# Altium PCB waffling60-BK.PcbDoc (part 2 of 2)
Units mm, origin at the board's own origin, x right, y up, seen from the top; angles counter-clockwise.
Board outline 284.8 x 94.3 mm, 2 copper layers (Component Side, Bottom Layer), stack 1.571 mm thick; 163 components, 103 nets, 753 pads, 61 vias.
Unrouted connection lines stored in the file: 18.
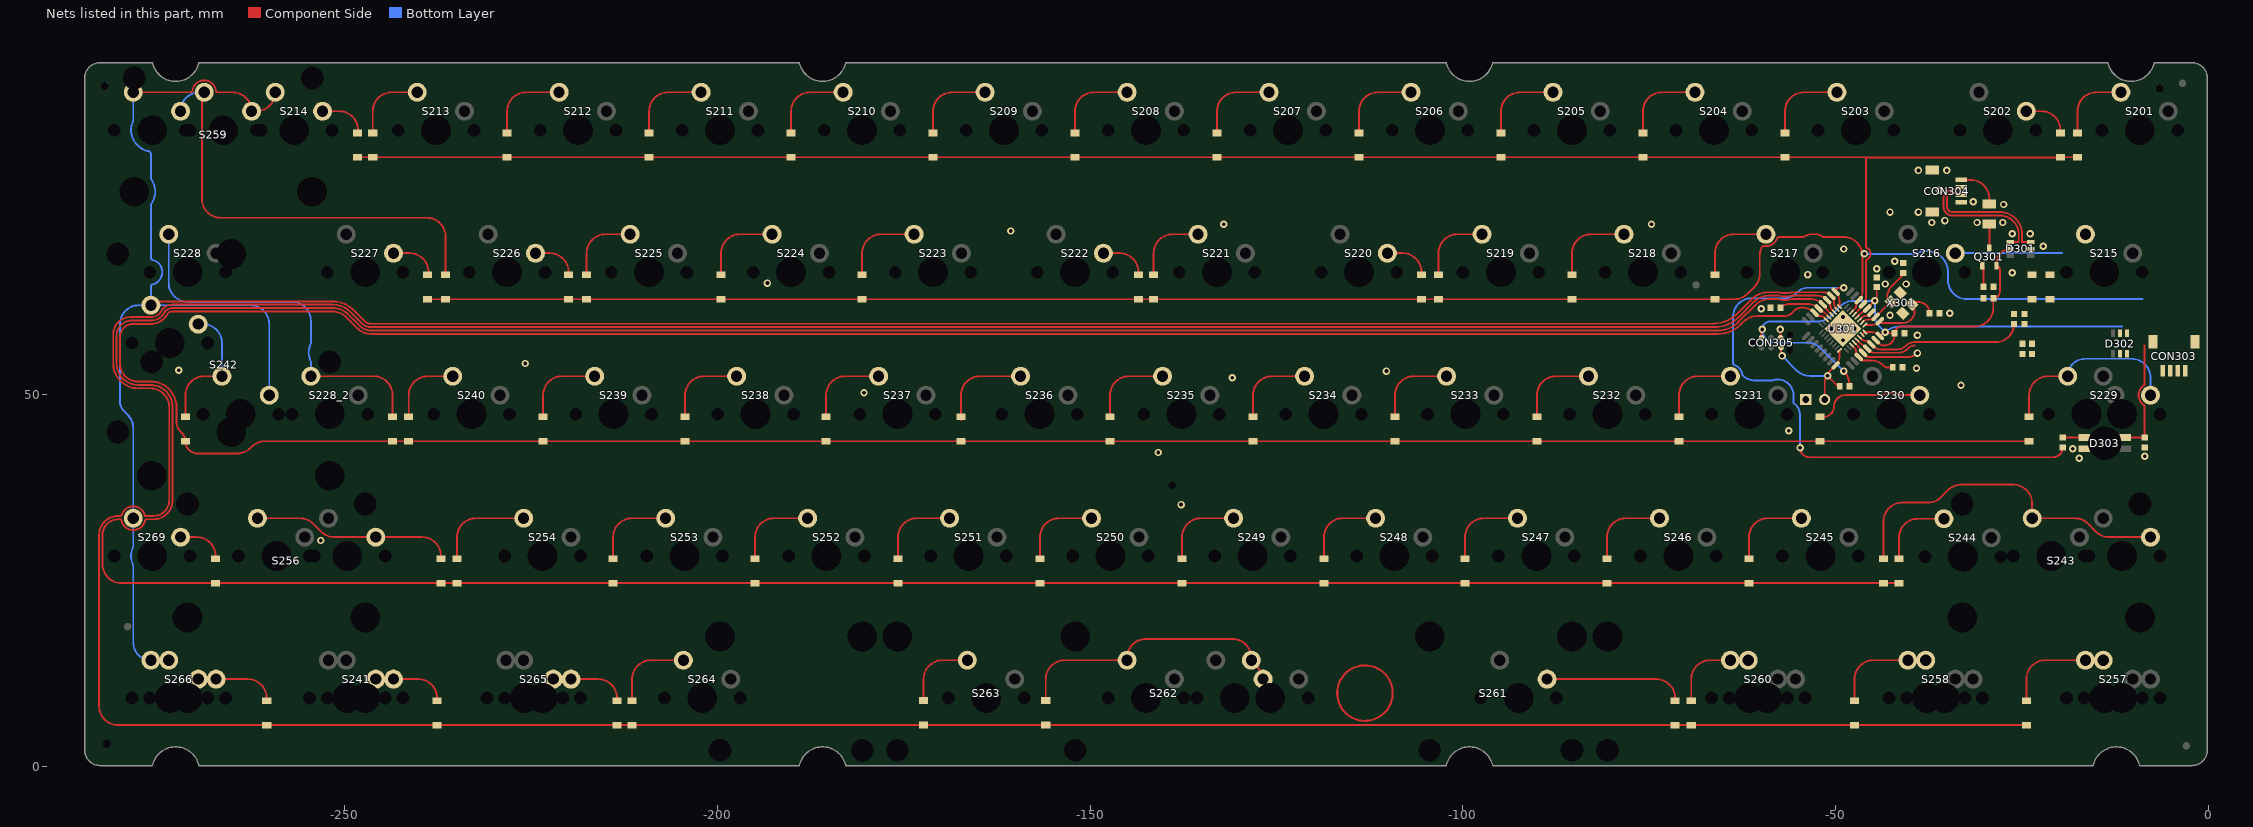
[diagram p2: the nets of this part, all layers, seen from the top]

## Via types
v1: diameter 1, hole 0.5, Component Side to Bottom Layer, tented both sides, 56 vias
v2: diameter 1, hole 0.5, Component Side to Bottom Layer, tented bottom, 5 vias

## Nets (pads, with @x,y where several pads share a name; then routed paths per layer and width w, separated by ;. In a path a pad name is that pad's centre, name@x,y a point inside that pad or via, vN(x,y) a via of type N, cw(c..) or ccw(c..) an arc to the next point about the centre after c; other vN are vias at no path point) (continued)
col14: S214.2 S242.2 S259.2 S266.2 S269.2 U301.10 | length 365.9
  Component Side w0.254: S259.2@-278.39,90.495 -272.542,90.495 -270.698,90.495 ccw(c-270.698,90.749) -270.447,90.714 cw(c-268.865,90.495) -270.403,90.924 cw(c-268.865,90.495) -268.362,92.011 cw(c-268.865,90.495) -268.36,92.01 cw(c-268.865,90.495) -267.283,90.714 ccw(c-267.032,90.749) -267.032,90.495 -265.055,90.495 cw(c-265.055,87.955) S259.2@-262.515,87.955 -261.88,87.955 ccw(c-261.88,90.495) S214.2@-259.34,90.495 ; S242.2@-276.02,61.925 cw(c-275.496,61.925) -275.496,62.449 -251.623,62.449 cw(c-251.623,58.547) -250.641,62.323 cw(c-251.623,58.547) -248.863,61.305 -248.592,61.034 -247.342,59.784 ccw(c-246.51,60.618) -247.329,59.772 ccw(c-246.51,60.618) -246.51,59.44 -66.518,59.44 ccw(c-66.518,64.25) -63.119,60.847 ccw(c-66.518,64.25) -63.117,60.849 -61.209,62.757 ; -61.209,62.757 cw(c-59.017,60.565) -59.017,63.665 -57.647,63.665 cw(c-57.646,63.411) -57.574,63.655 ccw(c-56.775,66.365) -55.976,63.655 cw(c-55.904,63.411) -55.903,63.665 -51.706,63.665 cw(c-51.706,62.015) U301.10@-50.54,63.182 cw(c-51.444,62.277) -50.165,62.277 -50.165,62.103 ccw(c-49.304,62.103) -49.913,61.494 U301.10@-49.797,61.379
  Bottom Layer w0.254: S259.2@-278.003,90.108 ccw(c-278.39,90.108) S259.2@-278.39,90.495 -278.39,86.712 cw(c-278.644,86.711) -278.414,86.604 ccw(c-275.85,85.415) -277.591,83.189 cw(c-277.747,82.989) -277.58,83.18 ccw(c-276.02,84.964) -276.486,82.641 ; -276.02,82.174 -276.02,81.534 -276.02,78.963 ccw(c-275.766,78.963) -275.972,78.814 cw(c-278.263,77.16) -275.972,75.506 ccw(c-275.766,75.357) -276.02,75.357 -276.02,68.26 ccw(c-275.766,68.26) -275.819,68.011 cw(c-276.167,66.365) -275.819,64.719 ccw(c-275.766,64.47) -276.02,64.47 S242.2@-276.02,61.925 ; -276.02,82.175 ccw(c-276.486,82.174) -276.335,82.615 ; S266.2@-276.008,14.295 cw(c-276.008,16.671) -278.384,16.671 -278.384,26.955 ccw(c-278.638,26.956) -278.408,27.064 cw(c-275.85,28.265) -278.408,29.466 ccw(c-278.638,29.574) -278.384,29.575 -278.384,33.345 S269.2@-278.39,33.345 -278.39,45.436 ccw(c-280.93,45.436) -279.134,47.232 -279.654,47.752 cw(c-278.428,48.978) -280.162,48.978 -280.162,59.385 cw(c-277.622,59.385) -277.622,61.925 S242.2@-276.02,61.925 ; S242.2@-260.14,49.855 -260.14,59.385 ccw(c-262.68,59.385) -262.68,61.925 S242.2@-276.02,61.925 ; -276.486,82.641 ccw(c-276.02,84.964) -276.335,82.615 ; -276.486,82.641 cw(c-276.486,82.174) -276.335,82.615
D_ALT_N: CON303.2@-4.072,53.148 D302.4 R309.2
D_ALT_P: CON303.3 D302.3 R308.2
D_N: CON304.2 D301.4 R305.2 | length 18.7
  Component Side w0.254: CON304.2@-33.125,77.75 cw(c-33.396,77.75) -33.396,77.479 -34.163,77.479 ccw(c-34.163,76.132) -35.509,76.132 -35.509,75.184 ccw(c-34.29,75.184) -34.29,73.965 -33.528,73.965 -30.48,73.965 -27.94,73.965 cw(c-27.94,71.425) -25.4,71.425 -25.4,70.485 ; D301.4@-26.521,70.419 -25.466,70.419 ccw(c-25.466,70.485) -25.4,70.485 ; -25.4,70.419 -25.4,70.485
D_P: CON304.3 D301.3 R304.2 | length 18.1
  Component Side w0.254: CON304.3@-33.125,76.75 ccw(c-33.396,76.75) -33.396,77.021 -34.163,77.021 ccw(c-34.163,76.132) -35.052,76.132 -35.052,75.184 ccw(c-34.29,75.184) -34.29,74.422 -27.94,74.422 cw(c-27.94,71.425) -24.943,71.425 -24.943,70.358 cw(c-24.882,70.358) -24.882,70.419 D301.3@-23.771,70.419
D_PRE_N: R305.1 R309.1 U301.30 | length 22.9
  Component Side w0.254: U301.30@-46.757,57.631 -46.579,57.453 ccw(c-45.847,58.185) -45.847,57.15 cw(c-45.847,56.648) -45.492,57.003 U301.30@-45.166,56.676 -44.888,56.399 ccw(c-43.942,57.345) -43.942,56.007 -41.704,56.007 ccw(c-41.704,57.655) -40.538,56.49 cw(c-39.373,55.324) -39.373,56.972 -28.484,56.972 ccw(c-28.484,59.421) R305.1@-26.035,59.421
D_PRE_P: R304.1 R308.1 U301.29 | length 8.7
  Component Side w0.254: U301.29@-47.11,57.277 -46.093,56.261 ccw(c-45.731,56.623) U301.29@-45.731,56.111 -45.451,55.83 ccw(c-44.774,56.507) -44.774,55.55 -41.514,55.55 ccw(c-41.514,57.198) -40.349,56.032 -40.215,56.166 cw(c-39.373,55.325) -39.373,56.515
GND: C301.1 C302.1 C303.1 C304.1 C305.1 C306.1 C307.1 CON303.1@-53.975,49.276 CON303.4 CON303.5 CON304.4 CON304.5 CON305.6 D301.2 D302.2 D303.3 R302.2 R306.2 U301.3 U301.28 X301.2 X301.4 | length 35.8
  Component Side w0.254: CON305.6@-57.357,57.531 v1@-57.357,58.213 ; U301.28@-47.464,56.924 U301.28@-46.447,55.907 ; U301.3@-46.757,59.964 -46.388,60.333 cw(c-46.101,60.046) -46.101,60.452 ccw(c-46.101,61.583) -45.302,60.783 U301.3@-45.166,60.919 ; U301.28@-46.447,55.907 cw(c-46.809,55.545) U301.28@-46.297,55.545 -45.737,54.985 -40.229,54.985 ccw(c-40.229,56.739) v1(-38.989,55.499) ; v1(-18.161,42.672) v1@-18.034,42.672 ; D303.3@-16.319,42.624 cw(c-16.251,42.624) D303.3@-16.315,42.648 ; D303.3@-16.3,42.672 D303.3@-16.157,42.672
  Component Side w0.279: -109.409,10.019 ccw(c-113.126,9.881) -109.408,10.005
  other v1: -253.238,30.353 -137.795,35.179 -17.272,41.402 -8.509,41.656 -140.843,42.164 -56.261,45.085 -180.34,50.165 -33.147,51.181 -130.937,52.197 -110.236,53.086 -272.288,53.213 -39.116,53.467 -225.806,54.102 -38.989,57.912 -57.404,58.674 -42.672,60.579 -34.671,60.833 -59.944,61.468 -43.307,64.77 -40.513,64.77 -193.294,64.897 -53.721,66.04 -26.289,66.294 -44.45,66.802 -42.037,67.818 -48.895,69.469 -22.098,69.85 -26.289,71.501 -23.876,71.501 -160.655,71.882 -132.08,72.771 -74.676,72.771 -37.084,73.025 -30.988,73.025 -27.559,73.025 -35.306,73.279 -42.672,74.422 -38.862,74.422 -27.432,75.438 -31.496,75.819 -36.068,77.343 -38.862,80.01 -35.052,80.01
  other v2: -48.984,57.242 -50.54,58.798 -48.984,58.798 -47.428,58.798 -48.984,60.353
LED: R307.2 U301.9 | length 81.1
  Component Side w0.254: v1(-54.737,42.799) ccw(c-53.467,42.799) -53.467,41.529 -20.821,41.529 ccw(c-20.821,42.85) R307.2@-19.5,42.85 R307.2@-19.761,42.85 ; U301.9@-49.444,61.732 -49.444,62.467 ccw(c-51.254,62.467) U301.9@-49.974,63.747 cw(c-49.459,63.747) -49.459,64.262 v1(-48.895,64.262)
  Bottom Layer w0.254: -56.161,51.257 ccw(c-57.727,49.855) -56.928,51.799 ccw(c-57.727,49.855) -56.93,51.8 ccw(c-57.727,49.855) -58.443,51.831 cw(c-58.53,52.07) -58.53,51.816 -60.706,51.816 cw(c-60.706,54.356) -62.419,52.481 cw(c-62.247,52.667) -62.498,52.63 ccw(c-64.077,52.395) -63.092,53.652 ccw(c-64.077,52.395) -63.094,53.653 ccw(c-64.077,52.395) -63.544,53.9 cw(c-63.459,54.14) -63.69,54.033 cw(c-63.092,54.31) -63.751,54.31 -63.751,60.325 cw(c-61.211,60.325) -61.211,62.865 -56.932,62.865 ccw(c-56.932,65.405) -55.136,63.609 -54.991,63.754 cw(c-53.765,62.528) -53.765,64.262 v1(-48.895,64.262) ; -56.161,51.256 cw(c-57.727,49.855) -55.639,50.095 cw(c-57.727,49.855) -55.627,49.923 cw(c-57.727,49.855) -55.627,49.79 ccw(c-55.373,49.783) -55.627,49.783 -55.627,48.92 ccw(c-55.373,48.92) -55.515,48.709 cw(c-56.457,47.315) -54.776,47.379 ; v1@-54.776,42.799 -54.776,47.246 ; -54.776,47.378 cw(c-56.457,47.315) -54.776,47.255 ; -54.776,47.246 cw(c-54.522,47.246) -54.776,47.255 ; -54.776,47.246 -54.776,47.255
NetC301_2: C301.2 U301.27 | length 6.9
  Component Side w0.254: U301.27@-47.817,56.57 -47.417,56.17 cw(c-47.833,55.753) -47.244,55.753 ccw(c-46.297,55.753) -46.967,55.083 U301.27@-46.863,54.979 -46.414,54.531 -45.287,54.531 cw(c-45.287,51.995) -43.493,53.787 -43.374,53.668 ccw(c-43.195,53.848) -43.195,53.594 C301.2@-42.306,53.594
NetC305_2: C305.2 U301.2 X301.3 | length 9.8
  Component Side w0.254: U301.2@-46.403,59.611 -46.373,59.641 cw(c-45.466,58.734) -45.466,60.017 -45.413,60.017 ccw(c-45.413,61.167) U301.2@-44.6,60.353 -42.571,62.363 X301.3@-42.527,62.407 cw(c-42.527,62.933) -43.053,62.933 cw(c-40.764,62.933) -42.383,64.551 -41.023,65.911 ccw(c-41.336,66.223) C305.2@-40.894,66.223
NetC306_2: C306.2 U301.1 X301.1 | length 12.4
  Component Side w0.254: U301.1@-46.05,59.257 -45.315,59.257 ccw(c-45.315,61.068) U301.1@-44.034,59.788 ccw(c-43.81,59.788) -43.81,59.563 -40.897,59.563 ccw(c-40.897,61.09) -39.37,61.09 ccw(c-40.733,61.09) X301.1@-39.769,62.053 ; X301.1@-39.769,62.053 cw(c-39.465,62.053) -39.465,62.357 -38.877,62.357 cw(c-38.877,60.833) C306.2@-37.353,60.833
NetD201_1: D201.1 S201.1 | length 10.2
  Component Side w0.254: D201.1@-17.526,85.05 -17.526,87.955 cw(c-14.986,87.955) -14.986,90.495 S201.1@-11.69,90.495
NetD202_1: D202.1 S202.1 | length 6.4
  Component Side w0.254: S202.1@-24.39,87.955 -22.352,87.955 cw(c-22.352,85.415) -19.812,85.415 D202.1@-19.812,85.05
NetD203_1: D203.1 S203.1 | length 11.3
  Component Side w0.254: D203.1@-56.769,85.05 -56.769,87.955 cw(c-54.229,87.955) -54.229,90.495 S203.1@-49.79,90.495
NetD204_1: D204.1 S204.1 | length 11.3
  Component Side w0.254: D204.1@-75.819,85.05 -75.819,87.955 cw(c-73.279,87.955) -73.279,90.495 S204.1@-68.84,90.495
NetD205_1: D205.1 S205.1 | length 11.3
  Component Side w0.254: D205.1@-94.869,85.05 -94.869,87.955 cw(c-92.329,87.955) -92.329,90.495 S205.1@-87.89,90.495
NetD206_1: D206.1 S206.1 | length 11.3
  Component Side w0.254: D206.1@-113.919,85.05 -113.919,87.955 cw(c-111.379,87.955) -111.379,90.495 S206.1@-106.94,90.495
NetD207_1: D207.1 S207.1 | length 11.3
  Component Side w0.254: D207.1@-132.969,85.05 -132.969,87.955 cw(c-130.429,87.955) -130.429,90.495 S207.1@-125.99,90.495
NetD208_1: D208.1 S208.1 | length 11.3
  Component Side w0.254: D208.1@-152.019,85.05 -152.019,87.955 cw(c-149.479,87.955) -149.479,90.495 S208.1@-145.04,90.495
NetD209_1: D209.1 S209.1 | length 11.3
  Component Side w0.254: D209.1@-171.069,85.05 -171.069,87.955 cw(c-168.529,87.955) -168.529,90.495 S209.1@-164.09,90.495
NetD210_1: D210.1 S210.1 | length 11.3
  Component Side w0.254: D210.1@-190.119,85.05 -190.119,87.955 cw(c-187.579,87.955) -187.579,90.495 S210.1@-183.14,90.495
NetD211_1: D211.1 S211.1 | length 11.3
  Component Side w0.254: D211.1@-209.169,85.05 -209.169,87.955 cw(c-206.629,87.955) -206.629,90.495 S211.1@-202.19,90.495
NetD212_1: D212.1 S212.1 | length 11.3
  Component Side w0.254: D212.1@-228.219,85.05 -228.219,87.955 cw(c-225.679,87.955) -225.679,90.495 S212.1@-221.24,90.495
NetD213_1: D213.1 S213.1 | length 10.3
  Component Side w0.254: D213.1@-246.253,85.05 -246.253,87.955 cw(c-243.713,87.955) -243.713,90.495 S213.1@-240.29,90.495
NetD214_1: D214.1 S214.1 | length 6.6
  Component Side w0.254: S214.1@-252.99,87.955 -250.759,87.955 cw(c-250.759,85.415) -248.219,85.415 D214.1@-248.219,85.05
NetD215_1: D215.1 S215.1
NetD216_1: D216.1 S216.1 | length 14.4
  Bottom Layer w0.254: S216.1@-33.915,68.905 -22.622,68.905 -19.558,68.905
NetD217_1: D217.1 S217.1 | length 11.2
  Component Side w0.254: D217.1@-66.167,66 -66.167,68.905 cw(c-63.627,68.905) -63.627,71.445 S217.1@-59.315,71.445
NetD218_1: D218.1 S218.1 | length 11.3
  Component Side w0.254: D218.1@-85.344,66 -85.344,68.905 cw(c-82.804,68.905) -82.804,71.445 S218.1@-78.365,71.445
NetD219_1: D219.1 S219.1 | length 10.2
  Component Side w0.254: D219.1@-103.251,66 -103.251,68.905 cw(c-100.711,68.905) -100.711,71.445 S219.1@-97.415,71.445
NetD220_1: D220.1 S220.1 | length 6.4
  Component Side w0.254: S220.1@-110.115,68.905 -108.077,68.905 cw(c-108.077,66.365) -105.537,66.365 D220.1@-105.537,66
NetD221_1: D221.1 S221.1 | length 10.3
  Component Side w0.254: D221.1@-141.478,66 -141.478,68.905 cw(c-138.938,68.905) -138.938,71.445 S221.1@-135.515,71.445
NetD222_1: D222.1 S222.1 | length 6.5
  Component Side w0.254: S222.1@-148.215,68.905 -146.05,68.905 cw(c-146.05,66.365) -143.51,66.365 D222.1@-143.51,66
NetD223_1: D223.1 S223.1 | length 11.3
  Component Side w0.254: D223.1@-180.594,66 -180.594,68.905 cw(c-178.054,68.905) -178.054,71.445 S223.1@-173.615,71.445
NetD224_1: D224.1 S224.1 | length 11.2
  Component Side w0.254: D224.1@-199.517,66 -199.517,68.905 cw(c-196.977,68.905) -196.977,71.445 S224.1@-192.665,71.445
NetD225_1: D225.1 S225.1 | length 10.2
  Component Side w0.254: D225.1@-217.551,66 -217.551,68.905 cw(c-215.011,68.905) -215.011,71.445 S225.1@-211.715,71.445
NetD226_1: D226.1 S226.1 | length 6.3
  Component Side w0.254: S226.1@-224.415,68.905 -222.504,68.905 cw(c-222.504,66.365) -219.964,66.365 D226.1@-219.964,66
NetD227_1: D227.1 S227.1 | length 6.5
  Component Side w0.254: S227.1@-243.465,68.905 -241.3,68.905 cw(c-241.3,66.365) -238.76,66.365 D227.1@-238.76,66
NetD228_1: D228.1 S259.1 | length 60
  Component Side w0.254: S259.1@-269.5,90.495 -269.182,90.495 -269.182,76.2 ccw(c-266.642,76.2) -266.642,73.66 -239.014,73.66 cw(c-239.014,71.12) -236.474,71.12 D228.1@-236.474,66
  Bottom Layer w0.254: S259.1@-272.04,87.955 cw(c-269.5,87.955) -269.5,90.495 S259.1@-268.865,90.495
NetD229_1: D229.1 S229.1 | length 25.8
  Component Side w0.254: D229.1@-24.003,46.95 -24.003,49.855 cw(c-21.463,49.855) -21.463,52.395 S229.1@-18.834,52.395
  Bottom Layer w0.254: S229.1@-18.834,52.395 cw(c-16.492,52.395) -16.492,54.737 -10.261,54.737 cw(c-10.261,52.197) -7.721,52.197 S229.1@-7.721,49.855
NetD230_1: D230.1 S230.1 | length 15.1
  Component Side w0.254: D230.1@-52.07,46.95 -51.602,46.95 ccw(c-51.602,48.387) -50.165,48.387 cw(c-48.697,48.387) -48.697,49.855 -46.657,49.855 -43.783,49.855 ccw(c-43.783,50.109) -43.676,49.879 cw(c-42.487,47.315) -41.299,49.879 ccw(c-41.192,50.109) -41.192,49.855 S230.1@-38.677,49.855
NetD231_1: D231.1 S231.1 | length 11.3
  Component Side w0.254: D231.1@-70.993,46.95 -70.993,49.855 cw(c-68.453,49.855) -68.453,52.395 S231.1@-64.077,52.395
NetD232_1: D232.1 S232.1 | length 11.3
  Component Side w0.254: D232.1@-90.043,46.95 -90.043,49.855 cw(c-87.503,49.855) -87.503,52.395 S232.1@-83.127,52.395
NetD233_1: D233.1 S233.1 | length 11.3
  Component Side w0.254: D233.1@-109.093,46.95 -109.093,49.855 cw(c-106.553,49.855) -106.553,52.395 S233.1@-102.177,52.395
NetD234_1: D234.1 S234.1 | length 11.3
  Component Side w0.254: D234.1@-128.143,46.95 -128.143,49.855 cw(c-125.603,49.855) -125.603,52.395 S234.1@-121.227,52.395
NetD235_1: D235.1 S235.1 | length 11.4
  Component Side w0.254: D235.1@-147.32,46.95 -147.32,49.855 cw(c-144.78,49.855) -144.78,52.395 S235.1@-140.277,52.395
NetD236_1: D236.1 S236.1 | length 12.8
  Component Side w0.254: D236.1@-167.32,46.515 D236.1@-167.32,46.95 -167.32,49.855 cw(c-164.78,49.855) -164.78,52.395 S236.1@-159.327,52.395
NetD237_1: D237.1 S237.1 | length 11.4
  Component Side w0.254: D237.1@-185.42,46.95 -185.42,49.855 cw(c-182.88,49.855) -182.88,52.395 S237.1@-178.377,52.395
NetD238_1: D238.1 S238.1 | length 10.8
  Component Side w0.254: D238.1@-204.343,46.95 -204.343,49.855 cw(c-201.803,49.855) -201.803,52.395 S238.1@-197.881,52.395
NetD239_1: D239.1 S239.1 | length 11.3
  Component Side w0.254: D239.1@-223.393,46.95 -223.393,49.855 cw(c-220.853,49.855) -220.853,52.395 S239.1@-216.477,52.395
NetD240_1: D240.1 S240.1 | length 10.3
  Component Side w0.254: D240.1@-241.427,46.95 -241.427,49.855 cw(c-238.887,49.855) -238.887,52.395 S240.1@-235.527,52.395
NetD241_1: D241.1 S242.1 | length 18.3
  Component Side w0.254: D241.1@-271.399,46.95 -271.399,49.855 cw(c-268.859,49.855) -268.859,52.395 S242.1@-266.49,52.395
  Bottom Layer w0.254: S242.1@-269.67,59.385 -269.03,59.385 cw(c-269.03,56.845) -266.49,56.845 S242.1@-266.49,52.395
NetD242_1: D242.1 S228.1 S228_2.1 | length 51.3
  Component Side w0.254: S228_2.1@-254.552,52.395 -246.126,52.395 cw(c-246.126,49.855) -243.586,49.855 D242.1@-243.586,46.95
  Bottom Layer w0.254: S228.1@-273.627,71.445 -273.627,64.919 ccw(c-271.087,64.919) -271.087,62.379 -257.092,62.379 cw(c-257.092,59.839) -254.552,59.839 -254.552,56.867 cw(c-254.806,56.866) -254.576,56.759 ccw(c-252.012,55.57) -254.576,54.381 cw(c-254.806,54.274) -254.552,54.273 S228_2.1@-254.552,52.395
NetD243_1: D243.1 S243.1 | length 47.3
  Component Side w0.254: D243.1@-43.561,27.9 -43.561,32.893 cw(c-41.021,32.893) -41.021,35.433 -37.628,35.433 ccw(c-37.628,37.973) -35.832,36.177 -34.907,37.102 cw(c-33.111,35.306) -33.111,37.846 -26.136,37.846 cw(c-26.136,35.306) -23.596,35.306 S243.1@-23.596,33.345 -17.887,33.345 cw(c-17.887,30.805) -16.091,32.601 -15.039,31.549 ccw(c-13.243,33.345) -13.243,30.805 S243.1@-7.721,30.805
NetD244_1: D244.1 S244.2 | length 10.3
  Component Side w0.254: D244.1@-41.468,27.9 -41.468,30.734 cw(c-38.928,30.734) -38.928,33.274 S244.2@-35.433,33.274
NetD245_1: D245.1 S245.1 | length 11.4
  Component Side w0.254: D245.1@-61.595,27.9 -61.595,30.805 cw(c-59.055,30.805) -59.055,33.345 S245.1@-54.552,33.345
NetD246_1: D246.1 S246.1 | length 11.4
  Component Side w0.254: D246.1@-80.645,27.9 -80.645,30.805 cw(c-78.105,30.805) -78.105,33.345 S246.1@-73.602,33.345
NetD247_1: D247.1 S247.1 | length 11.4
  Component Side w0.254: D247.1@-99.695,27.9 -99.695,30.805 cw(c-97.155,30.805) -97.155,33.345 S247.1@-92.652,33.345
NetD248_1: D248.1 S248.1 | length 11.3
  Component Side w0.254: D248.1@-118.618,27.9 -118.618,30.805 cw(c-116.078,30.805) -116.078,33.345 S248.1@-111.702,33.345
NetD249_1: D249.1 S249.1 | length 12.5
  Component Side w0.254: D249.1@-137.668,27.9 -137.668,30.805 cw(c-135.128,30.805) -135.128,33.345 S249.1@-130.752,33.345
  Bottom Layer w0.254: S249.1@-130.752,33.345 S249.1@-130.752,34.544
NetD250_1: D250.1 S250.1 | length 11.3
  Component Side w0.254: D250.1@-156.718,27.9 -156.718,30.805 cw(c-154.178,30.805) -154.178,33.345 S250.1@-149.802,33.345
NetD251_1: D251.1 S251.1 | length 11.3
  Component Side w0.254: D251.1@-175.768,27.9 -175.768,30.805 cw(c-173.228,30.805) -173.228,33.345 S251.1@-168.852,33.345
NetD252_1: D252.1 S252.1 | length 11.4
  Component Side w0.254: D252.1@-194.945,27.9 -194.945,30.805 cw(c-192.405,30.805) -192.405,33.345 S252.1@-187.902,33.345
NetD253_1: D253.1 S253.1 | length 11.4
  Component Side w0.254: D253.1@-213.995,27.9 -213.995,30.805 cw(c-211.455,30.805) -211.455,33.345 S253.1@-206.952,33.345
NetD254_1: D254.1 S254.1 | length 13.3
  Component Side w0.254: D254.1@-234.95,27.9 -234.95,30.805 cw(c-232.41,30.805) -232.41,33.345 S254.1@-226.002,33.345
NetD255_1: D255.1 S256.1 | length 27.2
  Component Side w0.254: S256.1@-261.62,33.345 -256.012,33.345 cw(c-256.012,30.805) -254.216,32.601 -253.164,31.549 ccw(c-251.368,33.345) -251.368,30.805 -245.745,30.805 -239.649,30.805 cw(c-239.649,28.265) -237.109,28.265 D255.1@-237.109,27.9
NetD256_1: D256.1 S269.1 | length 6.5
  Component Side w0.254: S269.1@-272.04,30.805 -269.875,30.805 cw(c-269.875,28.265) -267.335,28.265 D256.1@-267.335,27.9
NetD257_1: D257.1 S257.2 | length 12.3
  Component Side w0.254: D257.1@-24.384,8.85 -24.384,11.755 cw(c-21.844,11.755) -21.844,14.295 S257.2@-16.452,14.295
NetD258_1: D258.1 S258.2 | length 11.5
  Component Side w0.254: D258.1@-47.437,8.85 -47.437,11.755 cw(c-44.897,11.755) -44.897,14.295 S258.2@-40.264,14.295
NetD259_1: D259.1 S260.2 | length 9.6
  Component Side w0.254: D259.1@-69.342,8.85 -69.342,11.755 cw(c-66.802,11.755) -66.802,14.295 S260.2@-64.077,14.295
NetD260_1: D260.1 S261.1 | length 19
  Component Side w0.254: S261.1@-88.683,11.755 -74.041,11.755 cw(c-74.041,9.215) -73.914,11.752 cw(c-74.041,9.215) -71.501,9.215 D260.1@-71.501,8.85
NetD261_1: D261.1 S262.2 | length 38.8
  Component Side w0.254: D261.1@-155.956,8.874 -155.956,11.755 cw(c-153.416,11.755) -153.416,14.295 S262.2@-145.039,14.295 -145.039,14.605 cw(c-142.499,14.605) -142.499,17.145 -130.903,17.145 cw(c-130.903,14.605) -128.363,14.605 S262.2@-128.363,14.295 -127.837,13.769 cw(c-129.633,11.973) -127.093,11.973 S262.2@-127.093,11.755
  Bottom Layer w0.254: S262.2@-145.039,14.295 S262.2@-145.039,14.478 ; S262.2@-128.363,14.295 S262.2@-128.363,14.478
NetD262_1: D262.1 S263.2 | length 10.2
  Component Side w0.254: D262.1@-172.339,8.874 -172.339,11.755 cw(c-169.799,11.755) -169.799,14.295 S263.2@-166.471,14.295
NetD263_1: D263.1 S264.1 | length 11.2
  Component Side w0.254: D263.1@-211.455,8.85 -211.455,11.755 cw(c-208.915,11.755) -208.915,14.295 S264.1@-204.571,14.295
NetD264_1: D264.1 S265.1 | length 8
  Component Side w0.254: S265.1@-219.652,11.755 -216.027,11.755 cw(c-216.027,9.215) -213.487,9.215 D264.1@-213.487,8.85
NetD265_1: D265.1 S241.1 | length 7.7
  Component Side w0.254: S241.1@-243.464,11.755 -240.157,11.755 cw(c-240.157,9.215) -237.617,9.215 D265.1@-237.617,8.85
NetD266_1: D266.1 S266.1 | length 8.6
  Component Side w0.254: S266.1@-267.277,11.755 -263.017,11.755 cw(c-263.017,9.215) -260.477,9.215 D266.1@-260.477,8.85
NetD303_4: D303.4 R307.1 | length 3.4
  Component Side w0.254: R307.1@-19.558,44.084 cw(c-19.346,43.872) -19.346,44.172 D303.4@-16.157,44.172
NetF301_1: F301.1 Q301.3 | length 3.2
  Component Side w0.254: Q301.3@-29.352,69.6 -29.337,69.6 F301.1@-29.337,72.818
NetQ301_1: Q301.1 R306.1 | length 2.9
  Component Side w0.254: Q301.1@-30.302,67.2 cw(c-30.302,67.012) -30.114,67.012 R306.1@-30.114,64.389
NetR302_1: R302.1 U301.13 | length 7.3
  Component Side w0.254: R302.1@-57.389,61.595 cw(c-56.163,60.369) -56.163,62.103 -53.729,62.103 cw(c-53.729,59.992) U301.13@-52.237,61.485 cw(c-52.237,60.973) -51.875,61.335 U301.13@-50.858,60.318
RAW: CON303.1@-3.072,53.148 CON304.1 D302.5 F301.2 | length 5.9
  Component Side w0.254: CON304.1@-33.125,78.75 -31.877,78.75 cw(c-31.877,76.21) -29.337,76.21 F301.2@-29.337,75.518
row1: D201.2 D202.2 D203.2 D204.2 D205.2 D206.2 D207.2 D208.2 D209.2 D210.2 D211.2 D212.2 D213.2 D214.2 U301.5 | length 252.9
  Component Side w0.254: D214.2@-248.285,81.78 D213.2@-246.253,81.78 D212.2@-228.219,81.78 D211.2@-209.169,81.78 D210.2@-190.119,81.78 D209.2@-171.069,81.78 D208.2@-152.019,81.78 D207.2@-132.969,81.78 D206.2@-113.919,81.78 D205.2@-94.869,81.78 D204.2@-75.819,81.78 -45.901,81.78 ; U301.5@-47.464,60.672 -46.447,61.688 ccw(c-46.809,62.05) U301.5@-46.297,62.05 ; U301.5@-46.297,62.051 ccw(c-47.253,63.006) -45.901,63.006 -45.901,66.675 -45.901,67.853 cw(c-45.647,67.853) -45.754,68.083 ccw(c-46.101,68.834) -45.754,69.585 cw(c-45.647,69.815) -45.901,69.815 -45.901,71.12 -45.901,81.726 D202.2@-19.812,81.726 ; D202.2@-19.812,81.78 D201.2@-17.526,81.78
row2: D215.2 D216.2 D217.2 D218.2 D219.2 D220.2 D221.2 D222.2 D223.2 D224.2 D225.2 D226.2 D227.2 D228.2 U301.6 | length 249.2
  Component Side w0.254: D227.2@-238.76,62.73 D224.2@-199.517,62.73 D223.2@-180.594,62.73 D222.2@-143.51,62.73 D221.2@-141.478,62.73 -105.41,62.73 -103.124,62.73 D218.2@-85.344,62.73 D217.2@-66.167,62.73 -63.572,62.73 ccw(c-63.572,65.27) -61.776,63.474 -60.894,64.356 ccw(c-62.705,66.167) -60.144,66.167 -60.144,68.526 cw(c-57.604,68.526) -59.835,69.741 cw(c-59.612,69.618) -59.572,69.869 ccw(c-59.315,71.445) -57.814,70.9 cw(c-57.575,70.814) -57.604,71.066 -54.401,71.066 ccw(c-54.401,71.32) -54.271,71.102 cw(c-52.965,68.905) -51.659,71.102 ccw(c-51.529,71.32) -51.529,71.066 -48.895,71.066 cw(c-48.895,68.526) -46.355,68.526 -46.355,63.842 cw(c-48.088,63.842) -46.534,63.075 cw(c-48.088,63.842) -46.751,62.739 cw(c-48.088,63.842) U301.6@-46.863,62.616 -46.881,62.597 ccw(c-46.006,61.722) -47.244,61.722 cw(c-47.542,61.722) -47.331,61.511 U301.6@-47.817,61.025
  Bottom Layer w0.254: v1(-46.101,68.834) ccw(c-46.077,68.834) -46.077,68.81 -41.529,68.81 -39.142,68.81 cw(c-37.725,66.365) -36.634,68.971 cw(c-37.725,66.365) -35.023,67.192 cw(c-37.725,66.365) -34.9,66.422 ; -34.9,66.31 ccw(c-34.646,66.306) -34.9,66.306 -34.9,65.278 ccw(c-32.36,65.278) -32.36,62.738 -8.763,62.738 ; -34.9,66.311 ccw(c-37.725,66.365) -34.9,66.421
row3: D229.2 D230.2 D231.2 D232.2 D233.2 D234.2 D235.2 D236.2 D237.2 D238.2 D239.2 D240.2 D241.2 D242.2 U301.14 | length 501.3
  Component Side w0.254: U301.14@-51.211,59.964 -51.526,60.279 ccw(c-51.943,59.863) -51.943,60.452 cw(c-51.943,61.399) -52.613,60.729 U301.14@-52.802,60.919 ccw(c-54.434,59.287) -52.803,60.92 ccw(c-54.434,59.287) -54.434,61.595 -54.548,61.595 ccw(c-54.548,60.202) -55.533,61.187 -55.821,60.9 cw(c-56.902,61.982) -56.896,60.452 -57.203,60.452 -60.536,60.452 ccw(c-60.536,57.912) -62.332,59.708 -62.686,59.354 cw(c-65.766,62.434) -62.737,59.304 cw(c-65.766,62.434) -63.497,58.716 cw(c-65.766,62.434) -65.766,58.078 -246.51,58.078 cw(c-246.51,60.618) -248.306,58.822 -249.827,60.343 ccw(c-251.623,58.547) -251.623,61.087 -273.139,61.087 ccw(c-273.139,60.22) -273.752,60.833 cw(c-276.009,61.92) -274.179,60.209 cw(c-276.009,61.92) -276.009,59.415 -278.405,59.415 ccw(c-278.405,57.658) -280.162,57.658 -280.162,54.102 ccw(c-277.749,54.102) -277.749,51.689 -276.038,51.689 cw(c-276.038,48.241) -272.59,48.241 -272.59,46.3 ccw(c-270.692,46.3) -272.034,44.958 -271.854,44.778 cw(c-272.951,43.68) D241.2@-271.399,43.68 ccw(c-269.756,43.68) -271.162,42.83 ccw(c-269.756,43.68) -269.756,42.037 -264.45,42.037 ccw(c-264.45,44.577) -262.654,42.781 -262.499,42.936 cw(c-260.703,41.14) -260.703,43.68 D242.2@-243.586,43.68 D240.2@-241.427,43.68 D239.2@-223.393,43.68 D238.2@-204.343,43.68 D237.2@-185.42,43.68 D236.2@-167.32,43.68 D232.2@-90.043,43.68 D231.2@-70.993,43.68 D230.2@-52.07,43.68 D229.2@-24.003,43.68
row4: D243.2 D244.2 D245.2 D246.2 D247.2 D248.2 D249.2 D250.2 D251.2 D252.2 D253.2 D254.2 D255.2 D256.2 U301.12 | length 522.2
  Component Side w0.254: U301.12@-50.504,60.672 -51.521,61.688 cw(c-51.159,62.05) U301.12@-51.671,62.05 ccw(c-53.377,60.345) -51.672,62.051 ccw(c-53.377,60.345) -53.377,62.757 -55.78,62.757 ccw(c-55.781,62.503) -55.845,62.749 cw(c-56.775,66.365) -57.705,62.749 ccw(c-57.769,62.503) -57.77,62.757 -58.873,62.757 ccw(c-58.873,60.217) -60.669,62.013 -63.007,59.675 cw(c-65.766,62.434) -63.008,59.674 cw(c-65.766,62.434) -65.766,58.532 -246.51,58.532 cw(c-246.51,60.618) -247.983,59.141 -248.345,59.503 -249.505,60.663 ccw(c-251.623,58.547) -251.623,61.541 -273.139,61.541 ccw(c-273.139,60.22) -274.074,61.153 ccw(c-273.752,60.833) -274.156,61.041 -274.205,60.945 -274.212,60.932 cw(c-276.009,61.92) -274.304,60.78 cw(c-276.009,61.92) -276.009,59.869 -278.593,59.869 ccw(c-278.593,57.846) -280.616,57.846 -280.616,54.102 ccw(c-277.749,54.102) -277.749,51.235 -276.098,51.235 cw(c-276.098,48.241) -273.104,48.241 -273.104,35.748 cw(c-275.644,35.748) -274.443,33.51 cw(c-275.644,35.748) -275.644,33.208 -276.58,33.208 ccw(c-276.581,32.954) -276.829,33.008 cw(c-278.39,33.345) -279.95,33.002 ccw(c-280.198,32.947) -280.198,33.201 -280.416,33.201 ccw(c-280.416,31.115) -280.894,33.146 ccw(c-280.416,31.115) -282.502,31.115 -282.502,27.17 ccw(c-279.962,27.17) -279.962,24.63 D256.2@-267.335,24.63 D255.2@-237.109,24.63 D254.2@-234.95,24.63 D253.2@-213.995,24.63 D252.2@-194.945,24.63 D251.2@-175.768,24.63 D250.2@-156.718,24.63 D249.2@-137.668,24.63 D248.2@-118.618,24.63 D247.2@-99.695,24.63 D246.2@-80.645,24.63 D245.2@-61.595,24.63 D243.2@-43.561,24.63 D244.2@-41.468,24.63
row5: D257.2 D258.2 D259.2 D260.2 D261.2 D262.2 D263.2 D264.2 D265.2 D266.2 U301.11 | length 560
  Component Side w0.254: D262.2@-172.339,5.604 D262.2@-172.339,5.588 ; -60.99,62.334 -63.062,60.262 cw(c-66.142,63.342) -66.142,58.986 -246.51,58.986 cw(c-246.51,60.618) -247.015,59.066 cw(c-246.51,60.618) -247.663,59.463 -248.309,60.109 -248.341,60.142 -249.185,60.985 ccw(c-251.623,58.547) -250.284,61.725 ccw(c-251.623,58.547) -251.623,61.995 -273.139,61.995 ccw(c-273.139,60.22) -274.395,61.474 ccw(c-273.752,60.833) -274.553,61.26 -274.627,61.122 -274.64,61.097 cw(c-276.009,61.92) -276.009,60.323 -278.781,60.323 ccw(c-278.781,58.034) -281.07,58.034 -281.07,54.102 ccw(c-277.749,54.102) -277.749,50.781 -276.098,50.781 cw(c-276.098,48.241) -273.558,48.241 -273.558,35.748 cw(c-275.644,35.748) -274.172,34.27 cw(c-275.644,35.748) -275.644,33.662 -276.825,33.662 ccw(c-278.39,33.345) -279.911,33.832 cw(c-280.153,33.909) -280.153,33.655 -280.416,33.655 ccw(c-280.416,31.115) -282.956,31.115 -282.956,8.12 ccw(c-280.416,8.12) -280.416,5.58 D265.2@-237.617,5.58 -215.265,5.58 -215.265,5.588 D262.2@-172.339,5.588 ; -60.989,62.335 cw(c-58.873,60.217) -58.873,63.211 -57.711,63.211 cw(c-57.709,62.957) -57.642,63.202 ccw(c-56.775,66.365) -55.908,63.202 cw(c-55.841,62.957) -55.839,63.211 -52.541,63.211 cw(c-52.541,61.18) U301.11@-51.105,62.616 ; U301.11@-51.105,62.616 -50.91,62.421 cw(c-51.481,61.849) -50.673,61.849 ccw(c-49.945,61.849) -50.46,61.334 U301.11@-50.151,61.025 ; D257.2@-24.384,5.58 D258.2@-47.437,5.58 D259.2@-69.342,5.58 D260.2@-71.501,5.58 -104.648,5.58 -104.648,5.588 D262.2@-172.339,5.588
RST: CON303.2@-51.435,49.276 CON305.5 R301.2 U301.24 | length 17.7
  Component Side w0.254: CON305.5@-57.277,56.261 -57.277,55.245 v1(-57.15,55.118) ; CON303.2@-51.435,49.276 -51.435,51.531 cw(c-50.134,51.531) v1(-51.054,52.451) ; U301.24@-49.444,55.863 -49.444,55.128 cw(c-51.254,55.128) U301.24@-49.974,53.848 -50.83,52.992 ccw(c-50.289,52.451) v1(-51.054,52.451) ; R301.2@-49.418,51.054 cw(c-49.418,51.667) -49.852,51.234 -51.043,52.425 cw(c-51.018,52.451) v1(-51.054,52.451)
  Bottom Layer w0.254: v1(-57.15,55.118) -55.227,53.195 ccw(c-53.431,54.991) -53.431,52.451 v1(-51.054,52.451)
VCC: C302.2 C303.2 C304.2 C307.2 CON305.2 D301.5 D303.1 Q301.2 R301.1 U301.4 U301.31 U301.32 | length 124.5
  Component Side w0.254: CON305.2@-59.897,57.531 -59.897,58.594 v1(-59.817,58.674) ; v1(-48.895,53.086) -48.862,53.053 cw(c-50.658,51.257) -48.118,51.257 R301.1@-48.118,51.054 ; U301.4@-47.11,60.318 -46.093,61.335 cw(c-45.731,60.973) U301.4@-45.731,61.485 v1(-44.704,62.512) ccw(c-45.317,63.125) -44.45,63.125 C304.2@-44.45,64.374 ; U301.31@-46.403,57.985 U301.32@-46.05,58.338 -45.315,58.338 cw(c-45.315,56.527) U301.32@-44.034,57.808 v1@-43.676,58.166 ; U301.31@-44.6,57.242 -44.183,56.825 ccw(c-43.434,57.574) -43.434,56.515 ccw(c-43.434,57.897) -42.052,57.897 C303.2@-42.052,58.166 ; v1@-43.307,58.166 C303.2@-42.052,58.166 ; D301.5@-26.521,69.469 ccw(c-26.521,67.588) -28.402,67.588 Q301.2@-28.402,67.2 cw(c-28.402,66.738) -27.94,66.738 -27.94,63.739 cw(c-28.814,63.739) C302.2@-28.814,62.865 -28.814,61.595 cw(c-31.354,61.595) -31.354,59.055 -41.163,59.055 ccw(c-41.163,58.166) C303.2@-42.052,58.166 ; D303.1@-11.557,44.172 C307.2@-8.5,44.172 ; C307.2@-8.5,44.15 C307.2@-8.5,44.172 ; -8.5,56.515 -8.5,51.392 cw(c-8.754,51.391) -8.612,51.18 ccw(c-7.721,49.855) -8.612,48.53 cw(c-8.754,48.319) -8.5,48.318 C307.2@-8.5,44.172
  Bottom Layer w0.254: v1(-48.895,53.086) -51.961,56.152 ccw(c-53.757,54.356) -53.757,56.896 -58.039,56.896 cw(c-58.039,58.674) v1(-59.817,58.674) cw(c-58.758,58.674) -58.758,59.733 -52.444,59.733 ccw(c-52.444,62.273) -50.648,60.477 -49.357,61.768 cw(c-47.561,59.972) -47.561,62.512 v1(-44.704,62.512) -44.704,60.742 ccw(c-42.164,60.742) -43.96,58.946 v1(-43.307,58.293) -43.289,58.311 cw(c-41.493,56.515) -41.493,59.055 -11.557,59.055
pads on no net: CON305.0 D301.1 D301.6 D302.1 D302.6 D303. D303.2 FID1.0 FID2.0 FID3.0 FID4.0 S201. S202. S203. S204. S205. S206. S207. S208. S209. S210. S211. S212. S213. S214. S215. S216. S217. S218. S219. S220. S221. S222. S223. S224. S225. S226. S227. S228. S228_2. S229. S230. S231. S232. S233. S234. S235. S236. S237. S238. S239. S240. S241. S242. S243. S244. S245. S246. S247. S248. S249. S250. S251. S252. S253. S254. S256. S257. S258. S259. S260. S261. S262. S263. S264. S265. S266. S269.
copper on no net: | length 0.8
  Component Side w0.254: -222.033,11.755 -221.463,12.325

## Polygon pours and split planes (outlines as drawn)
GND on Bottom Layer "Component Side-No Net" (hatched 45Degree grid 1.397 track 0.203, remove dead copper, shelved, pour order 0): -0.635,93.995 -0.635,0.65 -284.607,0.65 -284.607,93.995
GND on Component Side "Component Side-No Net" (hatched 45Degree grid 1.397 track 0.203, remove dead copper, shelved, pour order 1): -0.635,93.995 -0.635,0.65 -284.607,0.65 -284.607,93.995

## Other copper
Component Side:
  pour cut-out: -282.85,-0.235 -275.85,-0.235 ccw(c-275.85,0.215) -275.411,0.114 cw(c-272.7,-0.52) -269.989,0.113 ccw(c-269.55,0.215) -269.55,-0.235 -189.05,-0.235 ccw(c-189.05,0.215) -188.611,0.113 cw(c-185.9,-0.52) -183.189,0.114 cw(c-185.9,-0.52) -183.189,0.113 -183.189,0.114 ccw(c-182.75,0.215) -182.75,-0.235 -102.25,-0.235 ccw(c-102.25,0.215) -101.811,0.115 cw(c-99.1,-0.52) -96.389,0.114 cw(c-99.1,-0.52) -96.389,0.113 -96.389,0.114 ccw(c-95.95,0.215) -95.95,-0.235 -15.45,-0.235 ccw(c-15.45,0.215) -15.011,0.114 cw(c-12.3,-0.52) -9.589,0.113 ccw(c-9.15,0.215) -9.15,-0.235 -2.15,-0.235 ccw(c-2.15,2.215) 0.3,2.215 0.3,36.574 0.3,36.576 0.3,92.415 ccw(c-2.15,92.415) -2.15,94.865 -7.15,94.865 ccw(c-7.15,94.415) -7.164,94.865 ccw(c-7.177,94.415) -7.616,94.517 cw(c-10.327,95.149) -13.038,94.516 cw(c-10.327,95.149) -13.038,94.517 -13.038,94.516 ccw(c-13.477,94.415) -13.477,94.865 -95.95,94.865 ccw(c-95.95,94.415) -96.389,94.517 cw(c-99.1,95.149) -101.811,94.516 cw(c-99.1,95.149) -101.811,94.517 -101.811,94.516 ccw(c-102.25,94.415) -102.25,94.865 -182.75,94.865 ccw(c-182.75,94.415) -183.189,94.516 ccw(c-185.9,95.149) -183.189,94.517 -183.189,94.516 cw(c-185.9,95.149) -188.611,94.517 ccw(c-189.05,94.415) -189.05,94.865 -269.55,94.865 ccw(c-269.55,94.415) -269.988,94.517 cw(c-272.7,95.149) -275.411,94.516 ccw(c-275.85,94.415) -275.85,94.865 -282.85,94.865 cw(c-282.85,94.415) -282.848,94.865 -282.85,94.865 ccw(c-282.85,92.415) -285.3,92.415 ccw(c-284.85,92.415) -285.3,92.413 -285.3,36.565 -285.3,2.215 ccw(c-284.85,2.215) -284.4,2.215 -284.4,36.565 -284.4,92.415 ccw(c-284.85,92.415) -284.4,92.416 cw(c-282.85,92.415) -282.851,93.965 ccw(c-282.85,94.415) -282.85,93.965 -276.189,93.965 ccw(c-272.7,95.149) -269.211,93.965 -189.389,93.965 ccw(c-185.9,95.149) -182.411,93.965 -102.589,93.965 ccw(c-99.1,95.149) -95.611,93.965 -13.816,93.965 ccw(c-10.327,95.149) -6.838,93.965 -2.15,93.965 cw(c-2.15,92.415) -0.6,92.415 -0.6,36.578 ccw(c-0.15,36.576) -0.6,36.576 -0.6,2.215 cw(c-2.15,2.215) -2.15,0.665 -8.811,0.665 ccw(c-12.3,-0.52) -15.789,0.665 -95.611,0.665 ccw(c-99.1,-0.52) -102.589,0.665 -182.411,0.665 ccw(c-185.9,-0.52) -189.389,0.665 -269.211,0.665 ccw(c-272.7,-0.52) -276.189,0.665 -282.85,0.665 ccw(c-282.85,0.215)
  pour cut-out: -285.3,2.215 ccw(c-282.85,2.215) -282.85,-0.235 ccw(c-282.85,0.215) -282.4,0.215 ccw(c-282.85,0.215) -282.85,0.665 cw(c-282.85,2.215) -284.4,2.215 ccw(c-284.85,2.215)
  pour cut-out: -182.364,0.288 ccw(c-185.9,-0.519) -189.447,0.242 ccw(c-189.322,0.215) -189.45,0.215 ccw(c-189.322,0.215) -189.322,0.088 -182.533,0.088 ccw(c-182.533,0.215) -182.423,0.15 ccw(c-182.488,0.26)
  pour cut-out: -269.164,0.288 ccw(c-272.7,-0.519) -276.247,0.242 ccw(c-276.122,0.215) -276.25,0.215 ccw(c-276.122,0.215) -276.122,0.088 -269.333,0.088 ccw(c-269.333,0.215) -269.223,0.15 ccw(c-269.288,0.26)
  pour cut-out: -95.564,0.288 ccw(c-99.1,-0.519) -102.647,0.242 ccw(c-102.522,0.215) -102.65,0.215 ccw(c-102.522,0.215) -102.522,0.088 -95.733,0.088 ccw(c-95.733,0.215) -95.623,0.15 ccw(c-95.688,0.26)
  pour cut-out: -8.764,0.288 ccw(c-12.3,-0.519) -15.847,0.242 ccw(c-15.722,0.215) -15.85,0.215 ccw(c-15.722,0.215) -15.722,0.088 -8.933,0.088 ccw(c-8.933,0.215) -8.823,0.15 ccw(c-8.888,0.26)
  pour cut-out: -13.836,94.342 ccw(c-10.3,95.149) -6.753,94.388 ccw(c-6.878,94.415) -6.75,94.415 ccw(c-6.878,94.415) -6.878,94.542 -13.667,94.542 ccw(c-13.667,94.415) -13.777,94.48 ccw(c-13.712,94.37)
  pour cut-out: -102.636,94.342 ccw(c-99.1,95.149) -95.553,94.388 ccw(c-95.678,94.415) -95.55,94.415 ccw(c-95.678,94.415) -95.678,94.542 -102.467,94.542 ccw(c-102.467,94.415) -102.577,94.48 ccw(c-102.512,94.37)
  pour cut-out: -189.436,94.342 ccw(c-185.9,95.149) -182.353,94.388 ccw(c-182.478,94.415) -182.35,94.415 ccw(c-182.478,94.415) -182.478,94.542 -189.267,94.542 ccw(c-189.267,94.415) -189.377,94.48 ccw(c-189.312,94.37)
  pour cut-out: -276.236,94.342 ccw(c-272.7,95.149) -269.153,94.388 ccw(c-269.278,94.415) -269.15,94.415 ccw(c-269.278,94.415) -269.278,94.542 -276.067,94.542 ccw(c-276.067,94.415) -276.177,94.48 ccw(c-276.112,94.37)
  region net GND: 1746 vertices and 2 holes, not listed, extent -116.144,6.751 -110.232,12.89
Bottom Layer:
  pour cut-out: -285.3,2.215 ccw(c-282.85,2.215) -282.85,-0.235 ccw(c-282.85,0.215) -282.4,0.215 ccw(c-282.85,0.215) -282.85,0.665 cw(c-282.85,2.215) -284.4,2.215 ccw(c-284.85,2.215)
  pour cut-out: -282.85,-0.235 -275.85,-0.235 ccw(c-275.85,0.215) -275.411,0.114 cw(c-272.7,-0.52) -269.989,0.113 ccw(c-269.55,0.215) -269.55,-0.235 -189.05,-0.235 ccw(c-189.05,0.215) -188.611,0.113 cw(c-185.9,-0.52) -183.189,0.114 cw(c-185.9,-0.52) -183.189,0.113 -183.189,0.114 ccw(c-182.75,0.215) -182.75,-0.235 -102.25,-0.235 ccw(c-102.25,0.215) -101.811,0.115 cw(c-99.1,-0.52) -96.389,0.114 cw(c-99.1,-0.52) -96.389,0.113 -96.389,0.114 ccw(c-95.95,0.215) -95.95,-0.235 -15.45,-0.235 ccw(c-15.45,0.215) -15.011,0.114 cw(c-12.3,-0.52) -9.589,0.113 ccw(c-9.15,0.215) -9.15,-0.235 -2.15,-0.235 ccw(c-2.15,2.215) 0.3,2.215 0.3,36.574 0.3,36.576 0.3,92.415 ccw(c-2.15,92.415) -2.15,94.865 -7.15,94.865 ccw(c-7.15,94.415) -7.164,94.865 ccw(c-7.177,94.415) -7.616,94.517 cw(c-10.327,95.149) -13.038,94.516 cw(c-10.327,95.149) -13.038,94.517 -13.038,94.516 ccw(c-13.477,94.415) -13.477,94.865 -95.95,94.865 ccw(c-95.95,94.415) -96.389,94.517 cw(c-99.1,95.149) -101.811,94.516 cw(c-99.1,95.149) -101.811,94.517 -101.811,94.516 ccw(c-102.25,94.415) -102.25,94.865 -182.75,94.865 ccw(c-182.75,94.415) -183.189,94.516 ccw(c-185.9,95.149) -183.189,94.517 -183.189,94.516 cw(c-185.9,95.149) -188.611,94.517 ccw(c-189.05,94.415) -189.05,94.865 -269.55,94.865 ccw(c-269.55,94.415) -269.988,94.517 cw(c-272.7,95.149) -275.411,94.516 ccw(c-275.85,94.415) -275.85,94.865 -282.85,94.865 cw(c-282.85,94.415) -282.848,94.865 -282.85,94.865 ccw(c-282.85,92.415) -285.3,92.415 ccw(c-284.85,92.415) -285.3,92.413 -285.3,36.565 -285.3,2.215 ccw(c-284.85,2.215) -284.4,2.215 -284.4,36.565 -284.4,92.415 ccw(c-284.85,92.415) -284.4,92.416 cw(c-282.85,92.415) -282.851,93.965 ccw(c-282.85,94.415) -282.85,93.965 -276.189,93.965 ccw(c-272.7,95.149) -269.211,93.965 -189.389,93.965 ccw(c-185.9,95.149) -182.411,93.965 -102.589,93.965 ccw(c-99.1,95.149) -95.611,93.965 -13.816,93.965 ccw(c-10.327,95.149) -6.838,93.965 -2.15,93.965 cw(c-2.15,92.415) -0.6,92.415 -0.6,36.578 ccw(c-0.15,36.576) -0.6,36.576 -0.6,2.215 cw(c-2.15,2.215) -2.15,0.665 -8.811,0.665 ccw(c-12.3,-0.52) -15.789,0.665 -95.611,0.665 ccw(c-99.1,-0.52) -102.589,0.665 -182.411,0.665 ccw(c-185.9,-0.52) -189.389,0.665 -269.211,0.665 ccw(c-272.7,-0.52) -276.189,0.665 -282.85,0.665 ccw(c-282.85,0.215)
  pour cut-out: -269.164,0.288 ccw(c-272.7,-0.519) -276.247,0.242 ccw(c-276.122,0.215) -276.25,0.215 ccw(c-276.122,0.215) -276.122,0.088 -269.333,0.088 ccw(c-269.333,0.215) -269.223,0.15 ccw(c-269.288,0.26)
  pour cut-out: -102.636,94.342 ccw(c-99.1,95.149) -95.553,94.388 ccw(c-95.678,94.415) -95.55,94.415 ccw(c-95.678,94.415) -95.678,94.542 -102.467,94.542 ccw(c-102.467,94.415) -102.577,94.48 ccw(c-102.512,94.37)
  pour cut-out: -189.436,94.342 ccw(c-185.9,95.149) -182.353,94.388 ccw(c-182.478,94.415) -182.35,94.415 ccw(c-182.478,94.415) -182.478,94.542 -189.267,94.542 ccw(c-189.267,94.415) -189.377,94.48 ccw(c-189.312,94.37)
  pour cut-out: -276.236,94.342 ccw(c-272.7,95.149) -269.153,94.388 ccw(c-269.278,94.415) -269.15,94.415 ccw(c-269.278,94.415) -269.278,94.542 -276.067,94.542 ccw(c-276.067,94.415) -276.177,94.48 ccw(c-276.112,94.37)
  pour cut-out: -8.764,0.288 ccw(c-12.3,-0.519) -15.847,0.242 ccw(c-15.722,0.215) -15.85,0.215 ccw(c-15.722,0.215) -15.722,0.088 -8.933,0.088 ccw(c-8.933,0.215) -8.823,0.15 ccw(c-8.888,0.26)
  pour cut-out: -13.836,94.342 ccw(c-10.3,95.149) -6.753,94.388 ccw(c-6.878,94.415) -6.75,94.415 ccw(c-6.878,94.415) -6.878,94.542 -13.667,94.542 ccw(c-13.667,94.415) -13.777,94.48 ccw(c-13.712,94.37)
  pour cut-out: -95.564,0.288 ccw(c-99.1,-0.519) -102.647,0.242 ccw(c-102.522,0.215) -102.65,0.215 ccw(c-102.522,0.215) -102.522,0.088 -95.733,0.088 ccw(c-95.733,0.215) -95.623,0.15 ccw(c-95.688,0.26)
  pour cut-out: -182.364,0.288 ccw(c-185.9,-0.519) -189.447,0.242 ccw(c-189.322,0.215) -189.45,0.215 ccw(c-189.322,0.215) -189.322,0.088 -182.533,0.088 ccw(c-182.533,0.215) -182.423,0.15 ccw(c-182.488,0.26)

## Silkscreen, mask and mechanical layers (free items; w line width, h text height)
Top Overlay:
  text "RESET" at -54.356,50.927 h0.75
  text "Waffling: adj. or verb - indecisive; unable to make up one's mind; playing the safe middle ground due to one's own lack of conviction or sense of morality." at -244.094,39.751 h2.9
  text "Waffling60 -B2" at -136.906,1.524 h3
  text "BK" at -122.809,1.397 h1.5
Top Solder:
  drawing of 2 lines, arcs and shapes, not listed
outline:
  lines w0.1: -24.208,94.415 -13.477,94.415 ccw(c-10.327,95.149) -7.177,94.415 ; -23.553,94.415 -95.95,94.415 cw(c-99.1,95.149) -102.25,94.415 -182.75,94.415 cw(c-185.9,95.149) -189.05,94.415 -269.55,94.415 cw(c-272.7,95.149) -275.85,94.415 -282.85,94.415 ccw(c-282.85,92.415) -284.85,92.415 -284.85,39.065 -284.85,2.215 ccw(c-282.85,2.215) -282.85,0.215 -275.85,0.215 cw(c-272.7,-0.52) -269.55,0.215 -189.05,0.215 cw(c-185.9,-0.52) -182.75,0.215 -102.25,0.215 cw(c-99.1,-0.52) -95.95,0.215 -15.45,0.215 cw(c-12.3,-0.52) -9.15,0.215 -2.15,0.215 ccw(c-2.15,2.215) -0.15,2.215 -0.15,36.576 -0.15,92.415 ccw(c-2.15,92.415) -2.15,94.415 -7.15,94.415
Mechanical 13:
  lines w0.1: -24.208,94.415 -13.477,94.415 ccw(c-10.327,95.149) -7.177,94.415 ; -23.553,94.415 -95.95,94.415 cw(c-99.1,95.149) -102.25,94.415 -182.75,94.415 cw(c-185.9,95.149) -189.05,94.415 -269.55,94.415 cw(c-272.7,95.149) -275.85,94.415 -282.85,94.415 ccw(c-282.85,92.415) -284.85,92.415 -284.85,36.565 -284.85,2.215 ccw(c-282.85,2.215) -282.85,0.215 -275.85,0.215 cw(c-272.7,-0.52) -269.55,0.215 -189.05,0.215 cw(c-185.9,-0.52) -182.75,0.215 -102.25,0.215 cw(c-99.1,-0.52) -95.95,0.215 -15.45,0.215 cw(c-12.3,-0.52) -9.15,0.215 -2.15,0.215 ccw(c-2.15,2.215) -0.15,2.215 -0.15,36.576 -0.15,92.415 ccw(c-2.15,92.415) -2.15,94.415 -7.15,94.415
Mechanical 16:
  drawing of 552 lines, arcs and shapes, not listed

## Dimensions
-0.15,92.415 to -284.85,92.415 on bot dimensions
-9.15,0.215 to -2.15,94.415 on bot dimensions
-0.15,92.415 to -284.85,92.415 on top dimensions
-9.15,0.215 to -7.177,94.415 on top dimensions

## Text inside footprints (layer, text, board x,y; h text height)
S262: Mechanical 16 "7U" at -208.331,7.365 h1.52 r270; Mechanical 16 "6.25U" at -188.764,5.615 h1.52 r270